# Altium PCB Sequential_Logic_SReg_Counter.PcbDoc
Units mm, origin at the board's own origin, x right, y up, seen from the top; angles counter-clockwise.
Board outline 155 x 110.5 mm, 2 copper layers (Top Layer, Bottom Layer); 70 components, 88 nets, 368 pads, 1 vias.
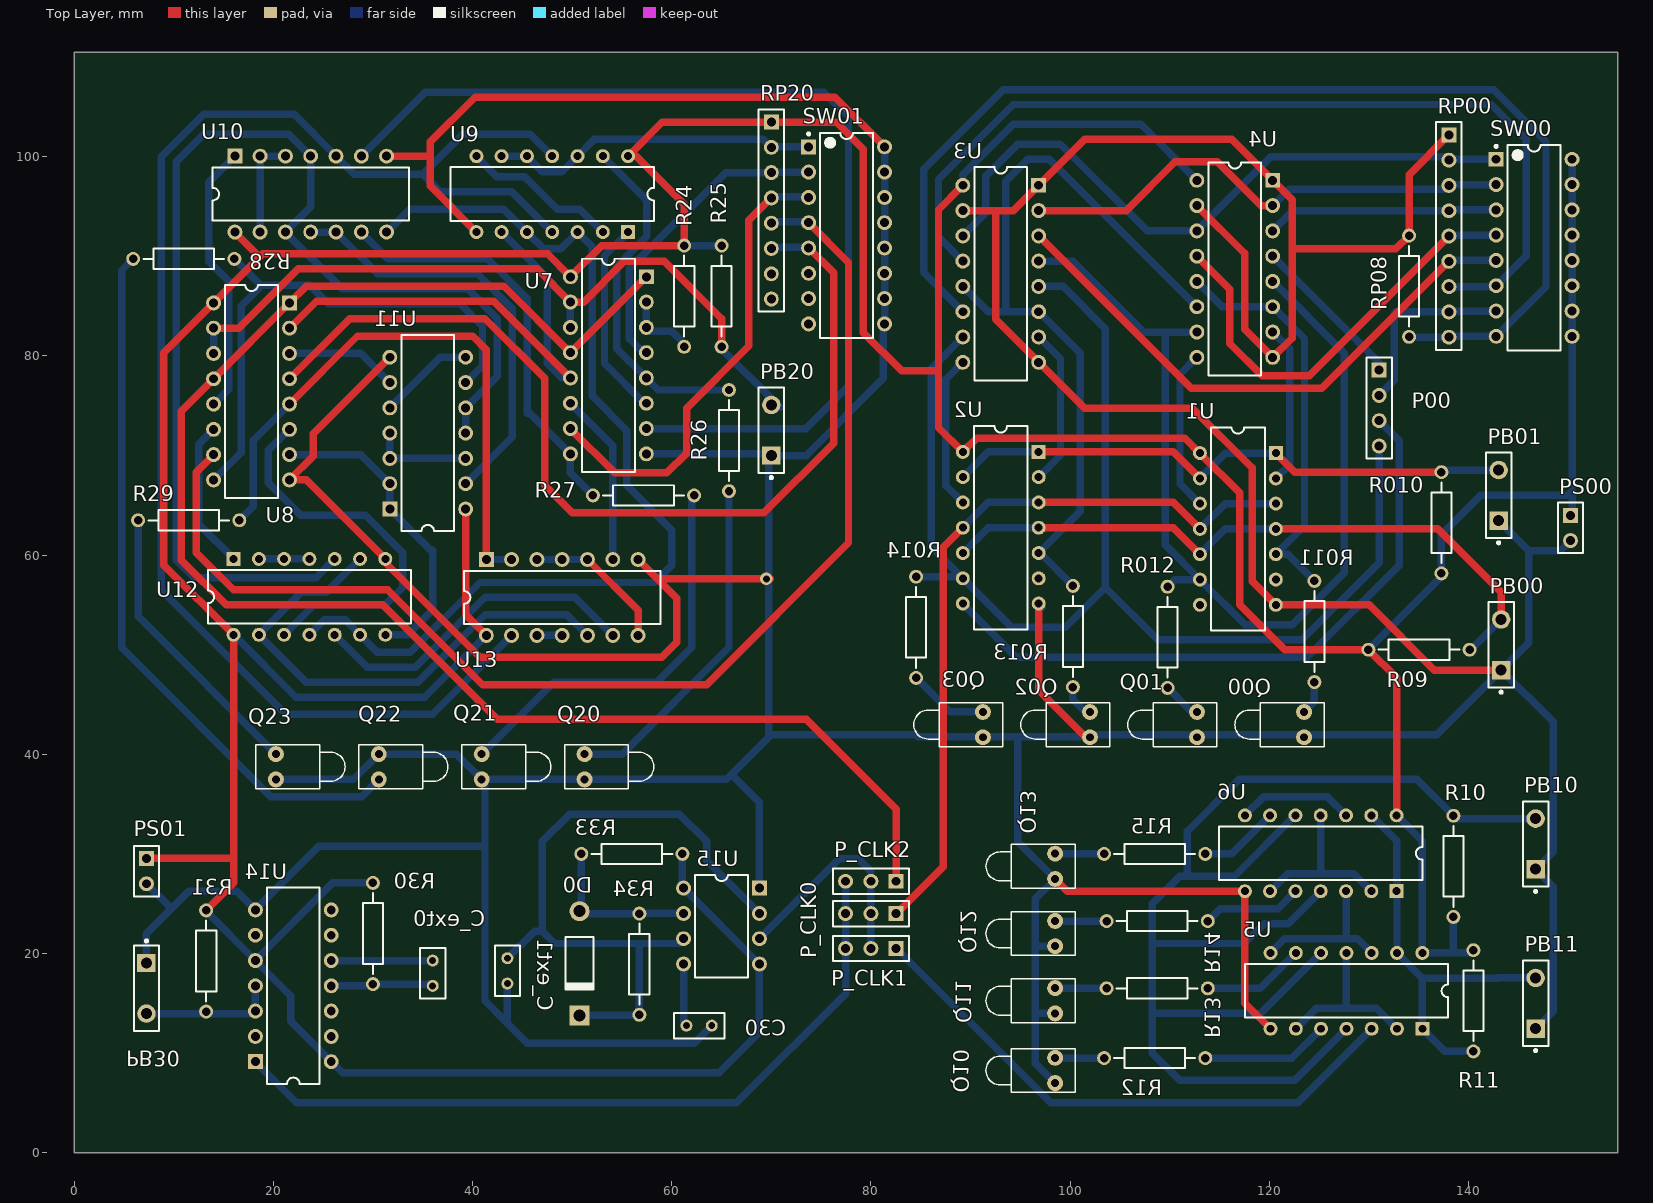
[diagram p0: Top Layer view]
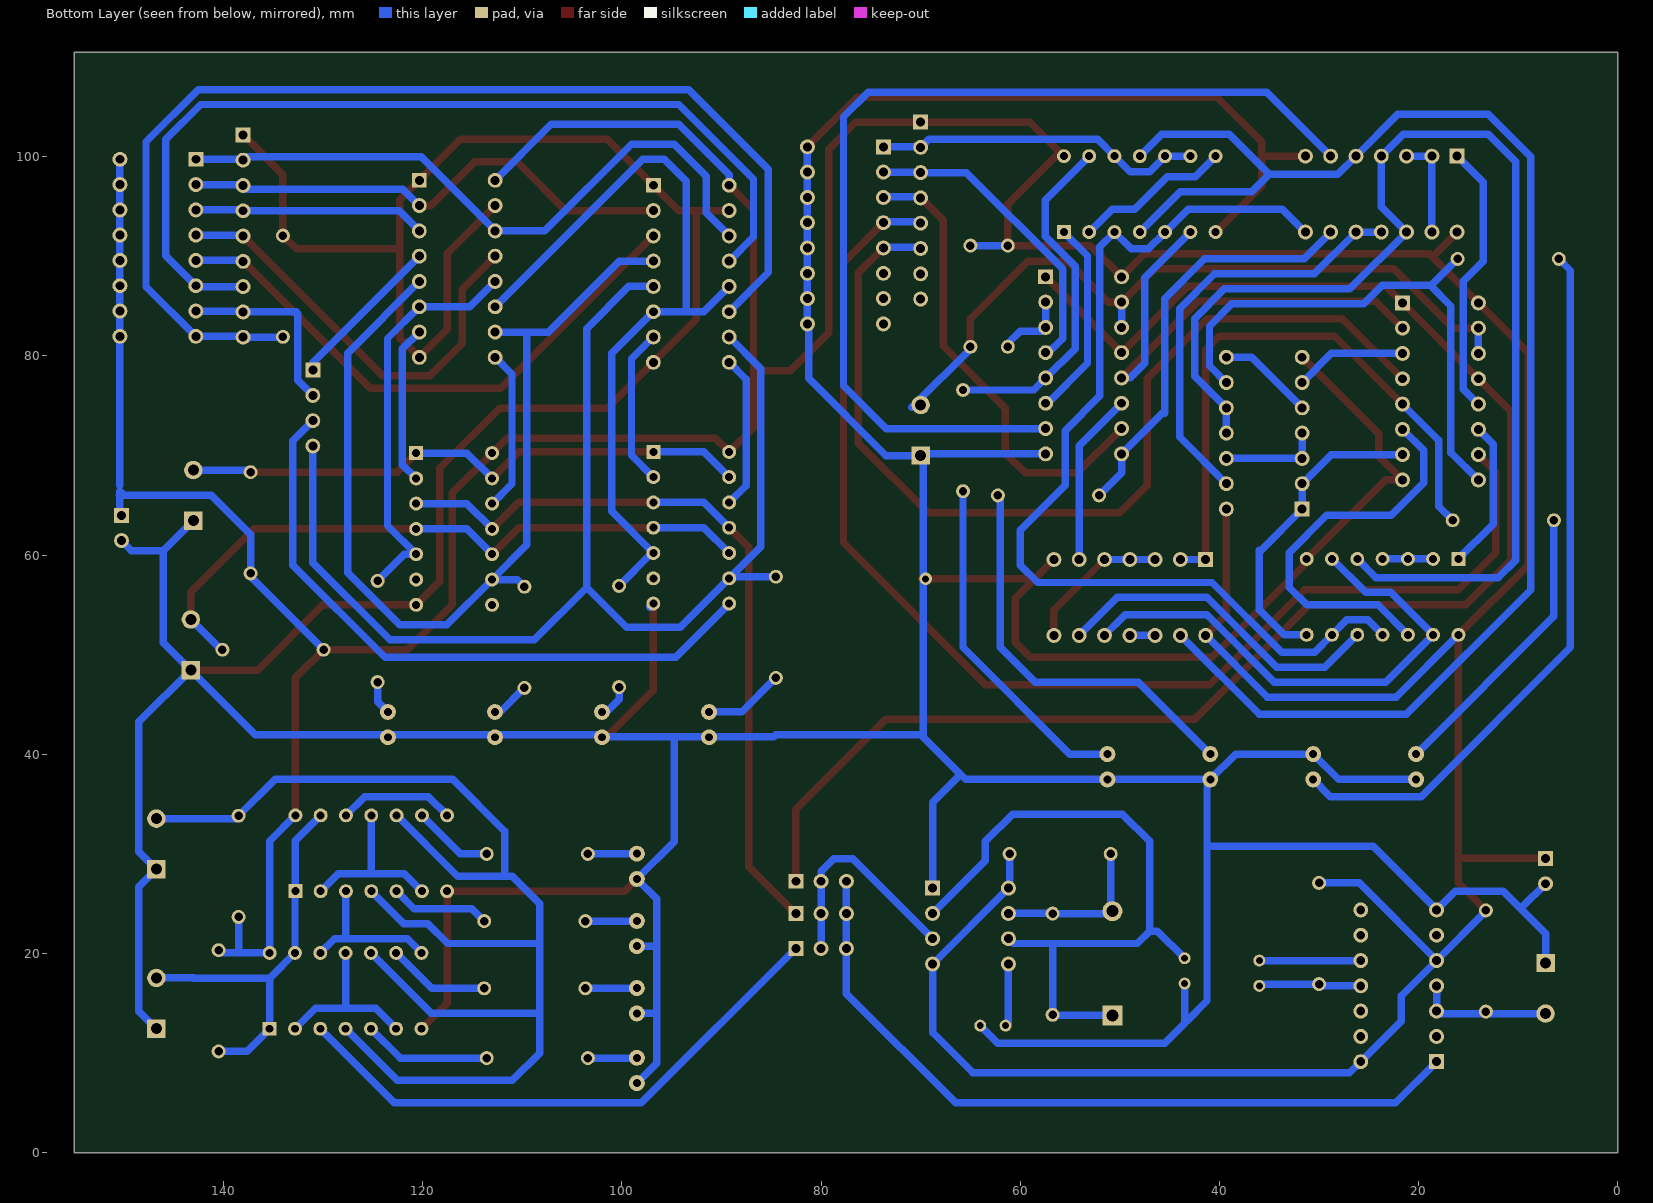
[diagram p1: Bottom Layer view, seen from below]

## Layer stack, top to bottom
Top Solder: solder mask 0.0102, Solder Resist, Dk 3.5
Top Layer: signal copper 0.0356
Dielectric1: dielectric 0.32, FR-4, Dk 4.8
Bottom Layer: signal copper 0.0356
Bottom Solder: solder mask 0.0102, Solder Resist, Dk 3.5

## Board outline
0,0 0,110.5 155,110.5 155,0

## Design rules (kind name [scope] priority, off if disabled: settings)
AssemblyTestPointUsage [All] p1: valid=2
Clearance [All] p1: gap=0.254
FabricationTestPointUsage TestPointUsage [All] p1: valid=2 allowmultiple=FALSE
FabricationTestpoint Testpoint [All] p1: side=3 testpointundercomponent=TRUE minsize=1.016 maxsize=2.54 preferedsize=1.524 minholesize=0 maxholesize=1.016 preferedholesize=0.813 testpointgrid=0.025 allowsidetop=TRUE allowsidebottom=TRUE usegrid=TRUE gridtolerance=0
MinimumSolderMaskSliver [All] p1: minsoldermaskwidth=0.15
PolygonConnect [All] p1: connectstyle=Relief reliefconductorwidth=0.254 reliefentries=4 polygonreliefangle="90 Angle" airgapwidth=0.254
RoutingVias [All] p1: holewidth=0.711 width=1.27 viastyle="Through Hole" minholewidth=0.711 minwidth=1.27 maxholewidth=0.711 maxwidth=1.27
SilkToSolderMaskClearance SilkToSolderMaskClearance_LED [IsPad vs HasFootprint('LED-1')] p1: minsilkscreentomaskgap=0.054 clearancetoexposedcopper=TRUE
SilkToSolderMaskClearance SilkscreenOverComponentPads [IsPad] p2: minsilkscreentomaskgap=0.15 clearancetoexposedcopper=TRUE
SolderMaskExpansion [All] p1: expansion=0.102
Width [All] p1: maxlimit=1 minlimit=0.254 preferedwidth=0.75
25 further rules are at their usual default settings.

## Components (designator, comment, footprint, x,y, rotation, side; value= is the part's Value field where it differs from the comment)
C30 "100pF" RAD-0.1 62.75,12.75 r180 top
C_ext0 "100pF" RAD-0.1 36,18.02 r270 top
C_ext1 "100pF" RAD-0.1 43.5,18.25 r270 top
D0 "Diode 1N4007" DO-41 50.75,19.02 r270 top
P00 "Header 4" HDR1X4 131.04,78.58 r270 top
P_CLK0 "Header 3" HDR1X3 82.54,24 r180 top
P_CLK1 "Header 3" HDR1X3 82.54,20.5 r180 top
P_CLK2 "Header 3" HDR1X3 82.54,27.25 r180 top
PB00 "SW-PB" SPST-2 143.29,51 r90 top
PB01 "SW-PB" SPST-2 143.04,66 r90 top
PB10 "SW-PB" SPST-2 146.75,31 r90 top
PB11 "SW-PB" SPST-2 146.75,15 r90 top
PB20 "SW-PB" SPST-2 70,72.54 r90 top
PB30 "SW-PB" SPST-2 7.25,16.5 r270 top
PS00 "Header 2" HDR1X2 150.25,64 r270 top
PS01 "Header 2" HDR1X2 7.25,29.54 r270 top
Q00 "LED0" LED-1#1 123.5,42.98 r180 top
Q01 "LED0" LED-1#1 112.75,42.98 r180 top
Q02 "LED0" LED-1#1 102,42.98 r180 top
Q03 "LED0" LED-1#1 91.25,42.98 r180 top
Q10 "LED0" LED-1#1 98.5,8.25 r180 top
Q11 "LED0" LED-1#1 98.5,15.25 r180 top
Q12 "LED0" LED-1#1 98.5,22 r180 top
Q13 "LED0" LED-1#1 98.5,28.75 r180 top
Q20 "LED0" LED-1#2 51.25,38.75 r0 top
Q21 "LED0" LED-1#2 40.917,38.75 r0 top
Q22 "LED0" LED-1#1 30.583,38.75 r0 top
Q23 "LED0" LED-1#2 20.25,38.75 r0 top
R09 "1K" AXIAL-0.4 135.04,50.5 r0 top
R10 "1K" AXIAL-0.4 138.5,28.75 r270 top
R010 "1K" AXIAL-0.4 137.29,63.25 r90 top
R11 "1K" AXIAL-0.4 140.5,15.25 r90 top
R011 "1K" AXIAL-0.4 124.54,52.33 r90 top
R12 "1K" AXIAL-0.4 108.5,9.5 r180 top
R012 "1K" AXIAL-0.4 109.79,51.75 r90 top
R13 "1K" AXIAL-0.4 108.75,16.5 r180 top
R013 "1K" AXIAL-0.4 100.29,51.83 r90 top
R14 "1K" AXIAL-0.4 108.75,23.25 r180 top
R014 "1K" AXIAL-0.4 84.54,52.75 r90 top
R15 "1K" AXIAL-0.4 108.5,30 r180 top
R24 "1K" AXIAL-0.4 61.25,86 r270 top
R25 "1K" AXIAL-0.4 65,86 r270 top
R26 "1K" AXIAL-0.4 65.75,71.5 r270 top
R27 "1K" AXIAL-0.4 57.17,66 r0 top
R28 "1K" AXIAL-0.4 11,89.75 r180 top
R29 "1K" AXIAL-0.4 11.5,63.5 r180 top
R30 "1K" AXIAL-0.4 30,22 r270 top
R31 "1K" AXIAL-0.4 13.25,19.25 r90 top
R33 "1K" AXIAL-0.4 56,30 r0 top
R34 "1K" AXIAL-0.4 56.75,18.92 r90 top
RP00 "Header 9" HDR1X9 138.04,102.2 r270 top
RP08 "1K" AXIAL-0.4 134.04,87 r90 top
RP20 "Header 8" HDR1X8 70,103.49 r270 top
SW00 "SW-DIP8" DIP-16 146.6,90.86 r0 top
SW01 "SW-DIP8" DIP-16 77.56,92.11 r0 top
U1 "MC54HC74AJ" 632-08 116.85,62.63 r270 top
U2 "MC54HC74AJ" 632-08 93.04,62.75 r270 top
U3 "MC74HC153N" 648-06 93.04,88.25 r270 top
U4 "MC74HC153N" 648-06 116.54,88.75 r270 top
U5 "MC54HC74AJ" 632-08 127.75,16.25 r180 top
U6 "MC54HC74AJ" 632-08 125.17,30.06 r180 top
U7 "MC74HC112N" 648-06 53.638,79.06 r270 top
U8 "MC74HC112N" 648-06 17.81,76.44 r270 top
U9 "MC54HC00AJ" 632-08 48,96.25 r180 top
U10 "MC74HC02AN" 646-06 23.75,96.25 r0 top
U11 "MC74HC10N" 646-06 35.5,72.25 r90 top
U12 "MC54HC02AJ" 632-08 23.62,55.81 r0 top
U13 "MC74HC27N" 646-06 49,55.75 r0 top
U14 "SN74121N" N014 22,16.75 r90 top
U15 "NE555JG" JG008 65,22.75 r270 top

## Footprints (in the part's own frame and the unit in brackets; to place one, negate y for a bottom-side part, rotate by r counter-clockwise, add the part's x,y. Pads: shape width x height; smd on the part's side, far side on the other; paste and mask are expansions set on the pad)
632-08 [mm] "DIP; 14 Leads; Row Spacing 7.62 mm; Pitch 2.54 mm"
  rect 1.4x1.4 hole 0.8: 1(-7.62,3.81)
  round 1.4 hole 0.8: 2(-5.08,3.81) 3(-2.54,3.81) 4(0,3.81) 5(2.54,3.81) 6(5.08,3.81) 7(7.62,3.81) 8(7.62,-3.81) 9(5.08,-3.81) 10(2.54,-3.81) 11(0,-3.81) 12(-2.54,-3.81) 13(-5.08,-3.81) 14(-7.62,-3.81)
  silkscreen extent -10.2,-2.7 10.2,2.7
646-06 [mm] "DIP; 14 Leads; Row Spacing 7.62 mm; Pitch 2.54 mm"
  rect 1.5x1.5 hole 0.9: 1(-7.62,3.81)
  round 1.5 hole 0.9: 2(-5.08,3.81) 3(-2.54,3.81) 4(0,3.81) 5(2.54,3.81) 6(5.08,3.81) 7(7.62,3.81) 8(7.62,-3.81) 9(5.08,-3.81) 10(2.54,-3.81) 11(0,-3.81) 12(-2.54,-3.81) 13(-5.08,-3.81) 14(-7.62,-3.81)
  silkscreen extent -9.85,-2.65 9.85,2.65
648-06 [mm] "DIP; 16 Leads; Row Spacing 7.62 mm; Pitch 2.54 mm"
  rect 1.5x1.5 hole 0.9: 1(-8.89,3.81)
  round 1.5 hole 0.9: 2(-6.35,3.81) 3(-3.81,3.81) 4(-1.27,3.81) 5(1.27,3.81) 6(3.81,3.81) 7(6.35,3.81) 8(8.89,3.81) 9(8.89,-3.81) 10(6.35,-3.81) 11(3.81,-3.81) 12(1.27,-3.81) 13(-1.27,-3.81) 14(-3.81,-3.81) 15(-6.35,-3.81) 16(-8.89,-3.81)
  silkscreen extent -10.7,-2.65 10.7,2.65
AXIAL-0.4 [mm] "Axial Device, Thru-Hole; 2 Leads; 0.4 in Pin Spacing"
  round 1.4 hole 0.85: 1(-5.08,0) 2(5.08,0)
  silkscreen extent -4.06,-1.02 4.06,1.02
DIP-16 [mm] "DIP; 16 Leads; Row Spacing 7.62 mm; Pitch 2.54 mm"
  rect 1.5x1.5 hole 0.9: 1(-3.81,8.89)
  round 1.5 hole 0.9: 2(-3.81,6.35) 3(-3.81,3.81) 4(-3.81,1.27) 5(-3.81,-1.27) 6(-3.81,-3.81) 7(-3.81,-6.35) 8(-3.81,-8.89) 9(3.81,-8.89) 10(3.81,-6.35) 11(3.81,-3.81) 12(3.81,-1.27) 13(3.81,1.27) 14(3.81,3.81) 15(3.81,6.35) 16(3.81,8.89)
  silkscreen extent -3.93,-10.3 2.65,10.31, body extent -3.6,-10.28 3.6,10.28, height 5.08
DO-41 [mm] "Diode, Axial; Body 5.2 x 2.7 mm (LxDia. max), Lead Dia. 0.86 mm (max)"
  round 2 hole 1.2: 1(-5.23,0)
  rect 2x2 hole 1.2: 2(5.23,0)
  silkscreen extent -2.65,-1.4 2.75,1.4
HDR1X2 [mm] "Connector; Header; 2 Position"
  rect 1.5x1.5 hole 0.9: 1(0,0)
  round 1.5 hole 0.9: 2(2.54,0)
  silkscreen extent -1.27,-1.27 3.81,1.27
HDR1X3 [mm] "Connector; Header; 3 Position"
  rect 1.5x1.5 hole 0.9: 1(0,0)
  round 1.5 hole 0.9: 2(2.54,0) 3(5.08,0)
  silkscreen extent -1.27,-1.27 6.35,1.27
HDR1X4 [mm] "Connector; Header; 4 Position"
  rect 1.5x1.5 hole 0.9: 1(0,0)
  round 1.5 hole 0.9: 2(2.54,0) 3(5.08,0) 4(7.62,0)
  silkscreen extent -1.27,-1.27 8.89,1.27
HDR1X8 [mm] "Connector; Header; 8 Position"
  rect 1.5x1.5 hole 0.9: 1(0,0)
  round 1.5 hole 0.9: 2(2.54,0) 3(5.08,0) 4(7.62,0) 5(10.16,0) 6(12.7,0) 7(15.24,0) 8(17.78,0)
  silkscreen extent -1.27,-1.27 19.05,1.27
HDR1X9 [mm] "Connector; Header; 9 Position"
  rect 1.5x1.5 hole 0.9: 1(0,0)
  round 1.5 hole 0.9: 2(2.54,0) 3(5.08,0) 4(7.62,0) 5(10.16,0) 6(12.7,0) 7(15.24,0) 8(17.78,0) 9(20.32,0)
  silkscreen extent -1.27,-1.27 21.59,1.27
JG008 [mm] "DIP; 8 Leads; Row Spacing 7.62 mm; Pitch 2.54 mm"
  rect 1.5x1.5 hole 0.9: 1(-3.81,3.81)
  round 1.5 hole 0.9: 2(-1.27,3.81) 3(1.27,3.81) 4(3.81,3.81) 5(3.81,-3.81) 6(1.27,-3.81) 7(-1.27,-3.81) 8(-3.81,-3.81)
  silkscreen extent -5.15,-2.65 5.15,2.65
LED-1#1 [mm] "LED; 2 Leads"
  round 1.6 hole 0.8: 1(0,-1.27) 2(0,1.27)
  silkscreen extent -2,-2.2 6.95,2.2
LED-1#2 [mm] "LED; 2 Leads"
  round 1.6 hole 0.8: 1(0,1.27) 2(0,-1.27)
  silkscreen extent -2,-2.2 6.95,2.2
N014 [mm] "DIP; 14 Leads; Row Spacing 7.62 mm; Pitch 2.54 mm"
  rect 1.5x1.5 hole 0.9: 1(-7.62,3.81)
  round 1.5 hole 0.9: 2(-5.08,3.81) 3(-2.54,3.81) 4(0,3.81) 5(2.54,3.81) 6(5.08,3.81) 7(7.62,3.81) 8(7.62,-3.81) 9(5.08,-3.81) 10(2.54,-3.81) 11(0,-3.81) 12(-2.54,-3.81) 13(-5.08,-3.81) 14(-7.62,-3.81)
  silkscreen extent -9.85,-2.65 9.85,2.65
RAD-0.1 [mm] "Radial Cap, Thru-Hole; 2 Leads; 0.1 in Pin Spacing"
  round 1.2 hole 0.7: 1(-1.27,0) 2(1.27,0)
  silkscreen extent -2.54,-1.27 2.54,1.27
SPST-2 [mm] "Switch; 2 Leads"
  rect 1.85x1.85 hole 1.1: 1(-2.54,0)
  round 1.85 hole 1.1: 2(2.54,0)
  silkscreen extent -4.89,-1.27 4.28,1.27

## Part data
C30: library part Cap, "Capacitor"
C_ext0 C_ext1: library part "Cap Pol1", "Polarized Capacitor (Radial)"
D0: "1 Amp General Purpose Rectifier"
P00: "Header, 4-Pin"
P_CLK0 P_CLK1 P_CLK2: "Header, 3-Pin"
PB00 PB01 PB10 PB11 PB20 PB30: "Switch"
PS00 PS01: "Header, 2-Pin"
Q00 Q01 Q02 Q03 Q10 Q11 Q12 Q13 Q20 Q21 Q22 Q23: "Typical INFRARED GaAs LED"
R09 R10 R010 R11 R011 R12 R012 R13 R013 R14 R014 R15 R24 R25 R26 R27 R28 R29 R30 R31 R33 R34 RP08: library part Res2, "Resistor"
RP00: "Header, 9-Pin"
RP20: "Header, 8-Pin"
SW00 SW01: "4009 Series DIP Switch, Raised actuator"
U1 U2 U5 U6: "Dual D-Type Flip-Flop with Set and Reset"
U3 U4: "Dual 4-Input Data Selector/Multiplexer"
U7 U8: "Dual J-K Flip-Flop with Set and Reset"
U9: "Quad 2-Input NAND Gate"
U10 U12: "Quad 2-Input NOR Gate"
U11: "Triple 3-Input NAND Gate"
U13: "Triple 3-Input NOR Gate"
U14: "Monostable Multivibrator with Schmitt-Trigger Inputs"
U15: "Precision Timer"

## Via types
v1: diameter 1.27, hole 0.711, Top Layer to Bottom Layer, 1 vias

## Nets (pads, with @x,y where several pads share a name; then routed paths per layer and width w, separated by ;. In a path a pad name is that pad's centre, name@x,y a point inside that pad or via, vN(x,y) a via of type N, cw(c..) or ccw(c..) an arc to the next point about the centre after c; other vN are vias at no path point)
CLK: P_CLK0.1 U1.3 U1.11 U2.3 U2.11 | length 76.2
  Top Layer w0.75: P_CLK0.1 87.25,28.71 87.25,60.77 U2.11 ; U2.3 110.38,65.29 U1.11
  Bottom Layer w0.75: U2.11 91.77,65.29 U2.3 ; U1.11 115.58,65.17 U1.3
CLK1: P_CLK1.1 U5.3 | length 57.3
  Bottom Layer w0.75: P_CLK1.1 98.04,5 122.85,5 U5.3
CLK2: P_CLK2.1 U7.1 U7.13 U8.1 U8.13 | length 162.1
  Top Layer w0.75: U7.1 U7.13 43.158,87 23.29,87 U8.1 U8.13 10.75,74.46 10.75,59.5 15.25,55 31,55 42.5,43.5 73.5,43.5 82.54,34.46 P_CLK2.1
D0: RP00.4 SW00.3 U4.3 | length 23.5
  Bottom Layer w0.75: U4.3 122.37,94.58 RP00.4 ; RP00.4@137.79,94.67 SW00.3
D1: RP00.5 SW00.4 U4.13 | length 44.3
  Top Layer w0.75: U4.13 116.04,86.71 116.04,81.25 119.29,78 124,78 RP00.5
  Bottom Layer w0.75: RP00.5@137.79,92.13 SW00.4
D2: RP00.6 SW00.5 U3.3 | length 57.8
  Top Layer w0.75: U3.3 112.16,76.75 125.29,76.75 RP00.6
  Bottom Layer w0.75: RP00.6@137.79,89.59 SW00.5
D3: RP00.7 SW00.6 U3.13 | length 93.5
  Bottom Layer w0.75: U3.13 86.79,91.96 86.79,97.75 94.29,105.25 142.29,105.25 145.79,101.75 145.79,90.05 SW00.6 142.7,86.96 RP00.7
GND: C30.1 C_ext1.2 PB00.1 PB01.1 PB10.1 PB11.1 PB20.1 PB30.1 PS00.2 PS01.2 Q00.2 Q01.2 Q02.2 Q03.2 Q10.2 Q11.2 Q12.2 Q13.2 Q20.2 Q21.2 Q22.2 Q23.2 RP00.1 RP08.2 SW01.9 SW01.10 SW01.11 SW01.12 SW01.13 SW01.14 SW01.15 SW01.16 U1.7 U2.7 U3.1 U3.8 U3.15 U4.1 U4.8 U4.15 U5.7 U6.7 U7.8 U8.8 U9.7 U10.7 U11.7 U12.7 U13.7 U14.7 U15.1 | length 803.5
  Top Layer w0.75: U10.7 35.69,100.06 ; U11.7 24,72.18 24,69.93 U8.8 23.31,67.55 U12.7 31.24,59.26 40.75,49.75 59,49.75 60.5,51.25 60.5,55.68 58.56,57.62 ; U9.7 35.75,97.07 35.75,101.5 40.25,106 76.37,106 SW01.16 ; U13.7 58.56,57.62 ; v1@69.88,57.62 58.56,57.62 ; U3.15 92.54,94.6 ; U2.7 96.85,46.44 Q02.2@101.54,41.75 ; Q10.2@98.5,6.5 Q10.2 ; Q13.2 99.73,26.25 U6.7 117.55,15.02 U5.7 ; U4.15 117.54,90.29 117.54,82.67 U4.8 122.29,81.8 122.29,90.75 ; RP00.1 134.04,98.2 RP08.2 132.71,90.75 122.29,90.75 ; PB00.1 136.58,48.46 130.03,55.01 U1.7 118.29,57.38 118.29,68.75 112.29,74.75 101.46,74.75 U3.8 92.54,83.67 92.54,94.6 ; 92.54,94.6 94.31,94.6 U3.1 101.46,101.75 116.24,101.75 U4.1 122.29,95.7 122.29,90.75
  Bottom Layer w0.75: PB30.1 7.25,22 9.625,24.375 ; PS01.2 9.625,24.625 9.625,24.375 ; Q23.2 28.043,37.48 Q22.2 38.377,40.02 Q21.2 ; 43.25,13.23 41.25,15.23 41.25,30.75 ; C_ext1.2 43.5,13 45.5,11 62.27,11 C30.1 ; U7.8 69.75,70.17 69.75,42.25 ; U15.1 68.81,35.17 66.02,37.96 66.02,38 ; PB20.1 73.5,70 81.25,77.75 SW01.9@81.25,83.22 ; SW01.9 SW01.10 SW01.11 SW01.12 SW01.13 SW01.14 SW01.15 SW01.16 ; U2.7 U2.7@97.23,54.75 ; Q10.2 96.5,8.98 96.5,14 ; Q11.2 96.52,13.98 96.5,14 ; Q12.2 96.52,20.73 96.5,20.75 ; U4.8@120.15,79.86 U4.8 ; PB01.1 146.04,60.46 ; PB11.1 148.5,14.21 148.5,26.71 PB10.1 148.5,30.21 148.5,43.25 PB00.1 ; PS00.2 149.25,60.46 146.04,60.46 ; 9.625,24.375 11.5,26.25 16.31,26.25 U14.7 24.57,30.75 41.25,30.75 ; Q21.2 41.25,37.147 41.25,30.75 ; Q21.2 Q20.2 65.5,37.48 66.02,38 ; 66.02,38 69.75,41.73 69.75,42.25 ; 69.75,42.25 70.02,41.98 84.54,41.98 84.77,41.75 94.75,41.75 ; 94.75,41.75 94.75,31.23 Q13.2 96.5,25.48 96.5,20.75 ; 94.75,41.75 101.54,41.75 101.77,41.98 136.81,41.98 PB00.1 ; 96.5,14 96.5,20.75 ; PB00.1 146.04,51.21 146.04,60.46
  other v1: 69.5,57.62
N(NXNQ0): U9.3 U9.5 U10.8 U12.9 U12.11 | length 101.8
  Bottom Layer w0.75: U12.11 25.12,53.5 27.2,53.5 U12.9 30.45,50.25 33.75,50.25 40.75,57.25 58.25,57.25 60,59 60,62.5 55.5,67 55.5,72.5 52,76 52,90.98 U9.3 48.85,90.75 47.15,90.75 U9.5 43.15,94.75 33.68,94.75 U10.8
N(XQ0): U9.4 U9.11 U10.5 U13.13 | length 150
  Bottom Layer w0.75: 36,99.25 35,98.25 ; U13.13 35.98,44 21.25,44 8.75,56.5 8.75,100 13,104.25 22.1,104.25 U10.5 28.1,98.25 35,98.25 ; U9.4 43.94,96.5 36.75,96.5 35,98.25 ; U9.11 45.81,102.25 39,102.25 35,98.25
NCLR: PB01.2 R010.2 U1.1 U1.13 U2.1 U2.13 | length 57.9
  Top Layer w0.75: U2.1 110.38,70.37 U1.13 ; U1.1 122.58,68.33 R010.2
  Bottom Layer w0.75: U2.13 91.77,70.37 U2.1 ; U1.13 115.58,70.25 U1.1 ; R010.2 137.5,68.54 PB01.2
NCLR1: PB11.2 R11.1 U5.1 U5.13 U6.1 U6.13 | length 41
  Bottom Layer w0.75: U6.13 132.79,31.33 U6.1 132.83,26.21 U5.13 135.37,17.52 ; R11.1 137.64,10.17 U5.1 135.37,17.52 ; PB11.2 143.02,17.54 143,17.52 135.37,17.52
NCLR2: PB20.2 R25.2 U7.14 U7.15 U8.14 U8.15 | length 75.5
  Top Layer w0.75: U8.15 16.54,82.79 22.5,88.75 46.488,88.75 U7.15 51.16,85.41 55.25,89.5 59.25,89.5 65,83.75 R25.2
  Bottom Layer w0.75: U8.14 U8.15 ; U7.14 U7.15 ; R25.2@64.79,80.92 PB20.2@70.88,74.83
NetC30_2: C30.2 U15.5 | length 6.3
  Bottom Layer w0.75: U15.5 61.19,13.04 C30.2
NetC_ext0_1: C_ext0.1 U14.10 | length 10.2
  Bottom Layer w0.75: U14.10 33.5,19.29 C_ext0.1
NetC_ext0_2: C_ext0.2 R30.2 U14.11 | length 10.3
  Bottom Layer w0.75: U14.11 29.83,16.75 R30.2 35.83,16.92 C_ext0.2
NetC_ext1_1: C_ext1.1 D0.2 R34.1 U15.2 U15.6 | length 69.9
  Bottom Layer w0.75: C_ext1.1 46.23,22.25 47,22.25 ; D0.2 56.7,13.79 R34.1 56.75,21 ; U15.6 60.71,21 56.75,21 ; U15.2 63.5,29.33 63.5,31.25 60.75,34 49.75,34 47,31.25 47,22.25 ; 47,22.25 48.25,21 56.75,21
NetD0_1: D0.1 R33.1 R34.2 U15.7 | length 16.4
  Bottom Layer w0.75: R33.1 50.92,24.42 D0.1 51,24 R34.2 56.77,24.02 U15.7
NetP00_2: P00.2 RP00.8 SW00.7 | length 19.4
  Bottom Layer w0.75: P00.2 132.54,77.54 132.54,84.25 132.71,84.42 RP00.8 ; RP00.8@137.79,84.51 SW00.7
NetP_CLK0_2: P_CLK0.2 P_CLK1.2 P_CLK2.2 U15.3 | length 22.8
  Bottom Layer w0.75: U15.3 76.83,29.5 78.75,29.5 80,28.25 P_CLK2.2 P_CLK1.2
NetP_CLK0_3: P_CLK0.3 P_CLK1.3 P_CLK2.3 U14.1 | length 76.8
  Bottom Layer w0.75: U14.1 22.32,5 66.5,5 77.46,15.96 P_CLK1.3 P_CLK2.3
NetPB30_2: PB30.2 R31.1 U14.3 U14.4 | length 13.6
  Bottom Layer w0.75: PB30.2 17.94,13.96 U14.3 U14.4
NetQ00_1: Q00.1 R011.1 | length 3.4
  Bottom Layer w0.75: Q00.1 124.54,45.29 R011.1
NetQ01_1: Q01.1 R012.1 | length 4
  Bottom Layer w0.75: R012.1 112.21,44.25 Q01.1
NetQ02_1: Q02.1 R013.1 | length 3
  Bottom Layer w0.75: R013.1 100.29,45.54 Q02.1@101.54,44.29
NetQ03_1: Q03.1 R014.1 | length 8.1
  Bottom Layer w0.75: R014.1 87.96,44.25 Q03.1
NetQ10_1: Q10.1 R12.2 | length 4.9
  Bottom Layer w0.75: Q10.1 98.52,9.5 R12.2
NetQ11_1: Q11.1 R13.2 | length 5.2
  Bottom Layer w0.75: Q11.1 98.52,16.5 R13.2
NetQ12_1: Q12.1 R14.2 | length 5.2
  Bottom Layer w0.75: Q12.1 98.52,23.25 R14.2
NetQ13_1: Q13.1 R15.2 | length 4.9
  Bottom Layer w0.75: Q13.1 98.52,30 R15.2
NetQ20_1: Q20.1 R26.2 | length 34.6
  Bottom Layer w0.75: Q20.1 55.02,40.02 65.75,50.75 R26.2
NetQ21_1: Q21.1 R27.2 | length 40.9
  Bottom Layer w0.75: Q21.1 48.147,47.25 58.5,47.25 62,50.75 62,65.75 R27.2
NetQ22_1: Q22.1 R28.2 | length 72.2
  Bottom Layer w0.75: R28.2 4.75,88.58 4.75,50.75 19.75,35.75 28.853,35.75 Q22.1
NetQ23_1: Q23.1 R29.2 | length 29.2
  Bottom Layer w0.75: R29.2 6.42,53.85 Q23.1
NetR24_2: R24.2 U7.2 U7.3 | length 7.3
  Bottom Layer w0.75: U7.2 U7.3 57.818,82.5 60,82.5 61.25,81.25 R24.2
NetU1_2: U1.2 U4.7 | length 16
  Bottom Layer w0.75: U4.7 122.04,80.71 122.04,69.09 U1.2
NetU1_12: U1.12 U4.9 | length 16.2
  Bottom Layer w0.75: U4.9 111.04,78.17 111.04,67.17 U1.12
NetU2_2: U2.2 U3.7 | length 15.9
  Bottom Layer w0.75: U2.2 99.04,70.02 99.04,79.71 U3.7
NetU2_12: U2.12 U3.9 | length 15.5
  Bottom Layer w0.75: U2.12 87.54,66.98 87.54,77.67 U3.9
NetU5_2: U5.2 U5.6 U5.11 | length 17.5
  Bottom Layer w0.75: U5.6 124.73,14.5 128,14.5 ; U5.11 127.75,14.75 128,14.5 ; U5.2 130.77,14.5 128,14.5
NetU5_8: U5.8 U5.12 U6.3 | length 16.2
  Bottom Layer w0.75: U5.8 121.57,21.5 127.5,21.5 ; U6.3 127.71,21.71 127.5,21.5 ; U5.12 128.85,21.5 127.5,21.5
NetU6_2: U6.2 U6.6 U6.11 | length 17.6
  Bottom Layer w0.75: U6.6 121.84,28 125.5,28 ; U6.11 125.17,28.33 125.5,28 ; U6.2 128.5,28 125.5,28
NetU6_8: U6.8 U6.12 | length 11.7
  Bottom Layer w0.75: U6.8 119.43,35.75 125.83,35.75 U6.12
NetU7_6: U7.6 U9.1 | length 20
  Bottom Layer w0.75: U9.1 53.25,90.07 53.25,79.25 57.25,75.25 U7.6
NetU7_7: U7.7 U10.6 | length 101.7
  Bottom Layer w0.75: U10.6 35.27,106.5 75.25,106.5 77.75,104 77.75,77 73.46,72.71 U7.7
NetU7_11: U7.11 U13.6 | length 17.5
  Bottom Layer w0.75: U7.11 54.08,70.998 U13.6
NetU8_3: U8.3 U11.6 | length 11.3
  Bottom Layer w0.75: U8.3 28.77,80.25 U11.6
NetU8_6: U8.6 U12.12 | length 40
  Bottom Layer w0.75: U12.12 24.08,55 31.25,55 33,56.75 33,60.25 29.25,64 22.75,64 19.5,67.25 19.5,70.51 U8.6
NetU8_7: U8.7 U11.1 U11.2 U12.8 | length 31.6
  Bottom Layer w0.75: U8.7 28.77,70.09 U11.2 U11.1 35.82,60.5 36,60.5 36,54.5 33.5,52 U12.8
NetU8_11: U8.11 U12.1 | length 15.1
  Bottom Layer w0.75: U8.11 12.5,71.13 12.5,63.12 U12.1
NetU8_12: U8.12 U10.1 | length 27.4
  Bottom Layer w0.75: U8.12 15.5,76.67 15.5,87.5 13.5,89.5 13.5,97.43 U10.1
NetU9_2: U9.2 U9.8 | length 15.9
  Bottom Layer w0.75: U9.8 42.44,98 45.25,98 48.5,94.75 50.77,94.75 U9.2
NetU10_2: U10.2 U10.3 U10.13 | length 10.2
  Bottom Layer w0.75: U10.13 U10.2 U10.3
NetU10_4: U10.4 U10.12 U11.10 U11.11 U12.5 | length 119.3
  Bottom Layer w0.75: U12.5 24.29,57.75 12,57.75 10.25,59.5 10.25,99.5 13,102.25 21.56,102.25 U10.4 23.75,94.98 U10.12 26.9,86.75 39.5,86.75 42.5,83.75 42.5,77.98 U11.10 U11.11
NetU10_10: U10.10 U10.11 U11.13 | length 43
  Bottom Layer w0.75: U10.11 U10.10 30.48,88.25 40.5,88.25 44,84.75 44,71.86 U11.13
NetU11_3: U11.3 U11.4 U11.12 | length 10.2
  Bottom Layer w0.75: U11.4 U11.3 U11.12
NetU11_5: U11.5 U11.8 | length 9.7
  Bottom Layer w0.75: U11.5 36.77,79.87 U11.8
NetU12_2: U12.2 U12.3 U12.4 | length 5.1
  Bottom Layer w0.75: U12.2 U12.3 U12.4
NetU12_6: U12.6 U12.13 U13.10 | length 51.9
  Bottom Layer w0.75: U12.6 25.33,56.25 22.79,56.25 U12.13 23.29,47.25 34.5,47.25 41.25,54 49.48,54 U13.10
NetU12_10: U12.10 U13.9 | length 33.7
  Bottom Layer w0.75: U12.10 29.41,48.75 34.25,48.75 41.25,55.75 50.27,55.75 U13.9
NetU13_3: U13.3 U13.4 U13.5 U13.8 | length 14.8
  Top Layer w0.75: U13.5 56.62,54.48 U13.8
  Bottom Layer w0.75: U13.3 U13.4 U13.5
NetU13_11: U13.11 U13.12 | length 2.5
  Bottom Layer w0.75: U13.12 U13.11
NPRE: PB00.2 R09.2 U1.4 U1.10 U2.4 U2.10 | length 67
  Top Layer w0.75: U2.4 110.38,62.75 U1.10 ; U1.4 136.91,62.63 143.29,56.25 PB00.2
  Bottom Layer w0.75: U2.10 91.77,62.75 U2.4 ; U1.10 115.58,62.63 U1.4 ; R09.2 140.25,50.5 PB00.2
NPRE1: PB10.2 R10.1 U5.4 U5.10 U6.4 U6.10 | length 137.9
  Bottom Layer w0.75: U6.10 116.51,27.75 112,27.75 ; U6.4 121.92,23 119.5,23 117.5,21 108.25,21 ; U5.10 119.15,14 108.5,14 108.25,14.25 ; U5.4 122.56,7.25 111,7.25 108.25,10 108.25,14.25 ; PB10.2 138.79,33.54 R10.1 134.83,37.5 117,37.5 111.75,32.25 111.75,28 112,27.75 ; 108.25,14.25 108.25,21 ; 108.25,21 108.25,25 111,27.75 112,27.75
NPRE20: RP20.3 SW01.2 U7.4 | length 31.4
  Bottom Layer w0.75: U7.4 57.17,80.33 55.75,81.75 55.75,88.75 65.41,98.41 RP20.3 70.05,98.46 SW01.2 SW01.2@73.67,98.54
NPRE21: RP20.4 SW01.3 U7.10 | length 47.4
  Top Layer w0.75: U7.10 54.288,68.25 59.5,68.25 61.5,70.25 61.5,74.75 67.75,81 67.75,93.62 RP20.4
  Bottom Layer w0.75: RP20.4@69.87,96 73.67,96 SW01.3
NPRE22: RP20.5 SW01.4 U8.10 | length 125.2
  Top Layer w0.75: U8.10 12.25,68.34 12.25,60.25 16,56.5 31.5,56.5 41,47 63.5,47 77.75,61.25 77.75,89.38 SW01.4
  Bottom Layer w0.75: RP20.5@69.87,93.46 73.67,93.46 SW01.4
NPRE23: RP20.6 SW01.5 U8.4 | length 98.9
  Top Layer w0.75: U8.4 27.66,83.75 41.25,83.75 47.25,77.75 47.25,67 50,64.25 69.25,64.25 76.25,71.25 76.25,88.34 SW01.5
  Bottom Layer w0.75: RP20.6@69.87,90.92 73.67,90.92 SW01.5
NQ03: P00.3 U2.8 | length 65.2
  Bottom Layer w0.75: U2.8 94.61,49.75 123.79,49.75 133.04,59 133.04,71.5 P00.3
Q00: R011.2 U1.5 U4.6 U4.12 | length 41
  Bottom Layer w0.75: U4.12 115.27,84.94 U4.6 123.54,81.75 123.54,62.97 U1.5 121.86,60.09 R011.2
Q01: R012.2 U1.9 U3.4 U4.5 U4.10 | length 99.4
  Bottom Layer w0.75: U3.4 100.27,89.52 107.39,82.4 U4.10 ; 109.54,82.4 109.54,61.05 U1.9 ; R012.2 110.51,57.55 U1.9 ; U4.5 127.54,80.29 127.54,58.25 122.29,53 117.59,53 U1.9
Q02: R013.2 U2.5 U3.6 U3.12 U4.11 | length 80.5
  Bottom Layer w0.75: U3.12 91.77,84.44 93.54,84.44 ; R013.2 96.99,60.21 U2.5 101.04,64.4 101.04,80.25 U3.6 93.54,84.44 ; U4.11 97.92,99.75 95.75,99.75 93.54,97.54 93.54,84.44
Q03: P00.4 R014.2 U2.9 U3.5 U3.10 | length 128.4
  Bottom Layer w0.75: R014.2 U2.9@89.07,57.83 ; U3.10 86.04,78.71 86.04,60.86 U2.9@89.07,57.83 ; U3.5 99.31,86.98 103.54,82.75 103.54,56.75 ; P00.4 131.04,59.25 123.29,51.5 108.79,51.5 103.54,56.75 ; U2.9@89.07,57.83 U2.9 94.15,52.75 99.54,52.75 103.54,56.75
Q10: R12.1 U5.5 | length 12.8
  Bottom Layer w0.75: R12.1 122.27,9.5 U5.5
Q11: R13.1 U5.9 | length 10.3
  Bottom Layer w0.75: R13.1 119.11,16.5 U5.9
Q12: R14.1 U6.5 | length 10
  Bottom Layer w0.75: R14.1 115.08,24.5 120.88,24.5 U6.5
Q13: R15.1 U6.9 | length 8.1
  Bottom Layer w0.75: R15.1 116.22,30 U6.9
Q20: R26.1 U7.5 U9.13 | length 35.4
  Bottom Layer w0.75: U9.13 57.5,95.64 57.5,92 54.5,89 54.5,80.738 U7.5 58.658,76.58 R26.1
Q21: R27.1 U7.9 U10.9 | length 42.1
  Bottom Layer w0.75: U10.9 28.83,92.42 31.5,89.75 41.5,89.75 45.5,85.75 45.5,74.25 45.748,74.25 U7.9 49.828,68.262 R27.1
Q22: R28.1 U8.9 U11.9 | length 55.5
  Bottom Layer w0.75: U8.9 16.75,70.3 16.75,85 18.75,87 ; R28.1 18.75,87.08 23.67,87.08 25.5,85.25 38.75,85.25 41,83 41,79.02 U11.9
Q23: R29.1 U8.5 U13.1 U13.2 | length 60.5
  Top Layer w0.75: U8.5 28.45,82 40,82 41.38,80.62 U13.1
  Bottom Layer w0.75: R29.1 18,64.92 18,71.55 U8.5 ; U13.1 U13.2
S00: RP00.2 SW00.1 U3.14 U4.14 | length 66.6
  Bottom Layer w0.75: U3.14 91.54,94.37 91.54,98.04 94.75,101.25 99.04,101.25 107.73,92.56 U4.14 120.17,100 137.7,100 RP00.2 ; RP00.2@137.79,99.75 SW00.1
S01: RP00.3 SW00.2 U3.2 U4.2 | length 50.9
  Top Layer w0.75: U3.2 105.64,94.6 110.54,99.5 114.79,99.5 119.19,95.1 U4.2
  Bottom Layer w0.75: U4.2 122,96.75 137.67,96.75 RP00.3 ; RP00.3@137.79,97.21 SW00.2
SL: RP00.9 RP08.1 SW00.8 U3.11 | length 114.9
  Bottom Layer w0.75: U3.11 85.29,88.38 85.29,98.75 93.29,106.75 142.54,106.75 147.79,101.5 147.79,86.97 SW00.8 137.79,81.97 RP00.9@137.7,81.88 ; RP08.1 134.08,81.88 RP00.9@137.7,81.88 ; RP00.9@137.57,81.75 RP00.9@137.7,81.88 ; RP00.9 RP00.9@137.7,81.88
SR: P00.1 U4.4 | length 15.9
  Bottom Layer w0.75: U4.4 131.04,79.33 P00.1
UP/NDOWN: RP20.2 SW01.1 U9.9 U9.10 U9.12 | length 33.2
  Bottom Layer w0.75: U9.9 U9.10 47.02,98.5 48.98,98.5 U9.12 52.23,101.75 69.2,101.75 RP20.2 ; RP20.2@70,101 SW01.1
VDD: PS00.1 PS01.1 R09.1 R010.1 R10.2 R11.2 R24.1 R25.1 R30.1 R31.2 R33.2 RP20.1 SW00.9 SW00.10 SW00.11 SW00.12 SW00.13 SW00.14 SW00.15 SW00.16 U1.14 U2.14 U3.16 U4.16 U5.14 U6.14 U7.16 U8.16 U9.14 U10.14 U11.14 U12.14 U13.14 U14.5 U14.14 U15.4 U15.8 | length 567.3
  Top Layer w0.75: PS01.1 15.79,29.54 ; R31.2 16,27.08 U12.14 9,59 9,80.33 U8.16 18.75,90.08 ; U10.14 18.49,90.08 18.75,90.08 ; U11.14 39.31,54.01 U13.14 ; U3.16@89.04,97.33 U3.16 86.79,94.7 86.79,78.5 ; U6.14 132.79,47.67 R09.1 121.54,50.5 117.04,55 117.04,66.25 U1.14 111.54,71.75 90.61,71.75 U2.14 86.79,72.81 86.79,78.5 ; 18.75,90.08 18.92,90.25 47.528,90.25 U7.16 52.958,91.08 R24.1 61.25,95.24 56.43,100.06 U9.14 59.05,103.49 RP20.1 76.51,103.49 79.25,100.75 79.25,82.35 83.1,78.5 86.79,78.5
  Bottom Layer w0.75: R31.2 13.25,24.23 U14.5 ; U12.14 22.25,45.75 35.19,45.75 U13.14 ; R30.1 25.98,27.08 U14.5 ; R33.2 61.08,26.67 U15.8 U15.4 68.81,12.06 64.75,8 26.94,8 U14.14 21.75,13.19 21.75,15.73 U14.5 ; R24.1 R25.1 ; U3.16 89.23,98.19 94.29,103.25 107.12,103.25 U4.16 ; R09.1 137.29,57.83 R010.1 137.29,62.04 141.25,66 150.5,66 150.25,66.25 ; U6.14 135.37,31.29 U5.14 138.5,20.06 ; R10.2 138.5,20.06 ; R11.2 140.23,20.06 138.5,20.06 ; PS00.1 150.41,64.16 150.41,66.41 ; SW00.16@150.29,99.75 SW00.16 ; 150.41,67 SW00.9 SW00.10 SW00.11 SW00.12 SW00.13 SW00.14 SW00.15 SW00.16 ; SW00.16@150.45,99.79 SW00.16
XQ0+NXNQ0: U7.12 U8.2 U9.6 | length 50.5
  Top Layer w0.75: U8.2 24.33,85.5 42.118,85.5 U7.12
  Bottom Layer w0.75: U9.6 47.5,87.86 47.5,79.25 48.96,77.79 U7.12
pads on no net: RP20.7 RP20.8 SW01.6 SW01.7 SW01.8 U1.6 U1.8 U2.6 U14.2 U14.6 U14.8 U14.9 U14.12 U14.13

## Silkscreen, mask and mechanical layers (free items; w line width, h text height)
Mechanical 16:
  drawing of 1874 lines, arcs and shapes, not listed
  text "1" at -29.036,151.509 h1.78
  text "2" at 43.608,151.509 h1.78
  text "3" at 116.76,151.509 h1.78
  text "4" at 189.658,151.509 h1.78
  text "A" at -63.377,128.497 h1.78
  text "A" at 223.643,128.497 h1.78
  text "B" at -63.377,80.44 h1.78
  text "B" at 223.643,80.44 h1.78
  text "C" at -63.377,31.926 h1.78
  text "C" at 223.643,31.926 h1.78
  text "ENGINEER:" at 108.708,-5.082 h1.14
  text "TITLE:" at 146.808,-5.082 h1.14
  text "PCB DESIGNER:" at 108.708,-12.575 h1.14
  text "D" at -63.377,-16.08 h1.78
  text "D" at 223.643,-16.08 h1.78
  text "DATE:" at 108.708,-20.322 h1.14
  text "PART NO.:" at 146.808,-20.322 h1.14
  text "REV:" at 200.148,-20.322 h1.14
  text "Altium Limited" at 75.688,-22.862 h1.78
  text ".PRINT_DATE" at 109.978,-23.37 h1.78
  text "12a Rodborough Rd" at 75.688,-25.402 h1.78
  text "Frenchs Forest" at 75.688,-27.942 h1.78
  text "FILE NAME:" at 108.708,-27.942 h1.14
  text "DWG NO:" at 146.808,-27.942 h1.14
  text "SCALE:" at 200.148,-27.942 h1.14
  text "NSW 2086" at 75.688,-30.482 h1.78
  text ".PCB_FILE_NAME_NO_PATH" at 109.978,-30.99 h1.78
  text "1" at -29.036,-36.451 h1.78
  text "2" at 43.608,-36.451 h1.78
  text "3" at 116.76,-36.451 h1.78
  text "4" at 189.658,-36.451 h1.78